# Altium PCB LowerMachine_test_v3.0.PcbDoc
Units mil, origin at the board's own origin, x right, y up, seen from the top; angles counter-clockwise.
Board outline 1968.5 x 1968.5 mil, 2 copper layers (Top Layer, Bottom Layer); 43 components, 58 nets, 180 pads, 51 vias.
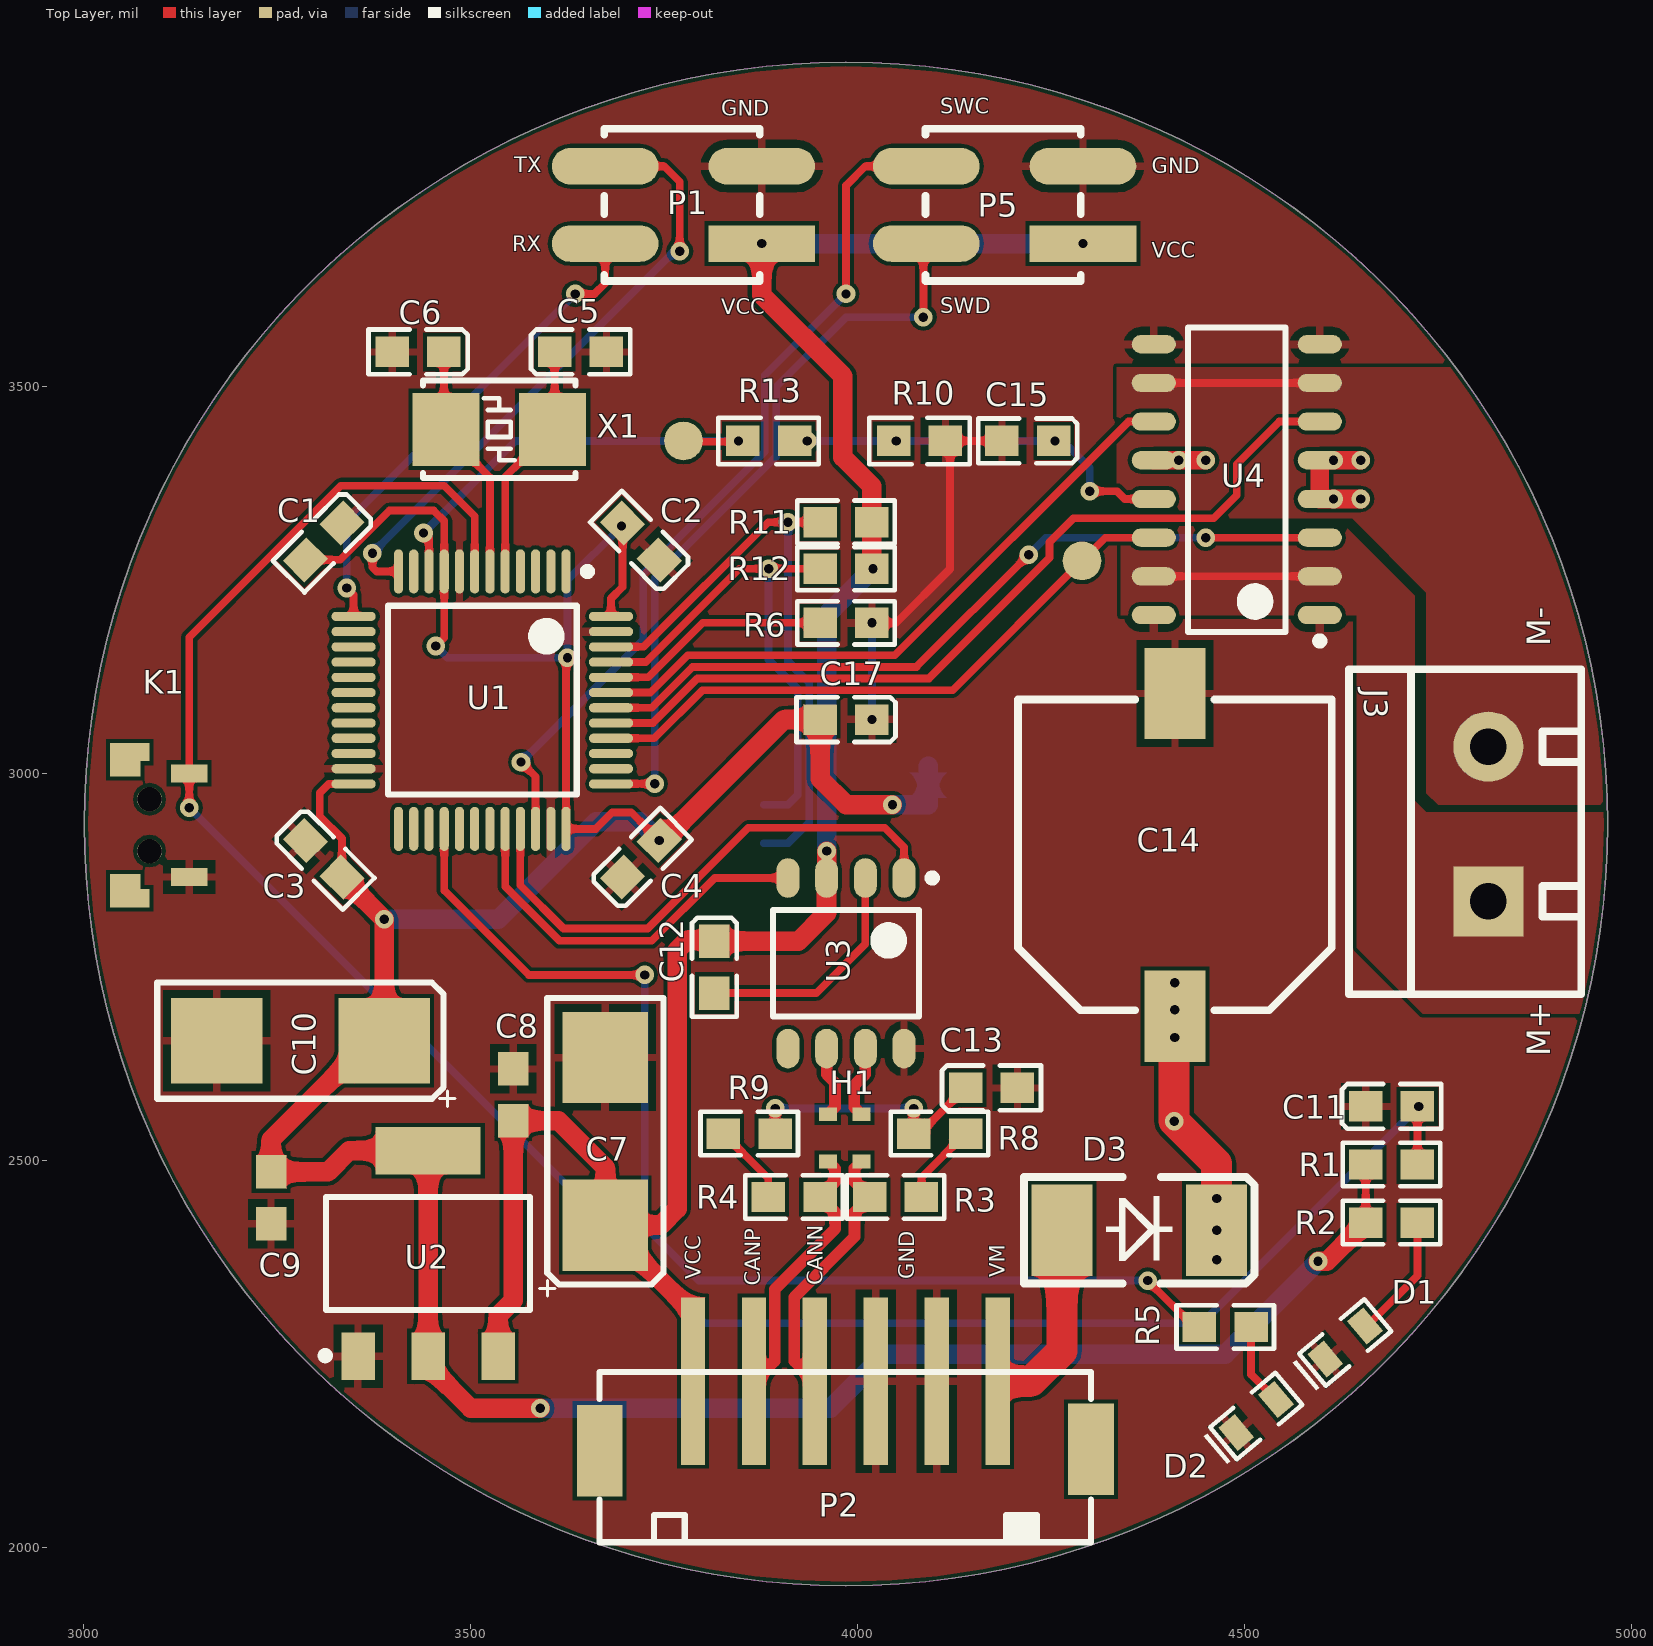
[diagram p0: Top Layer view]
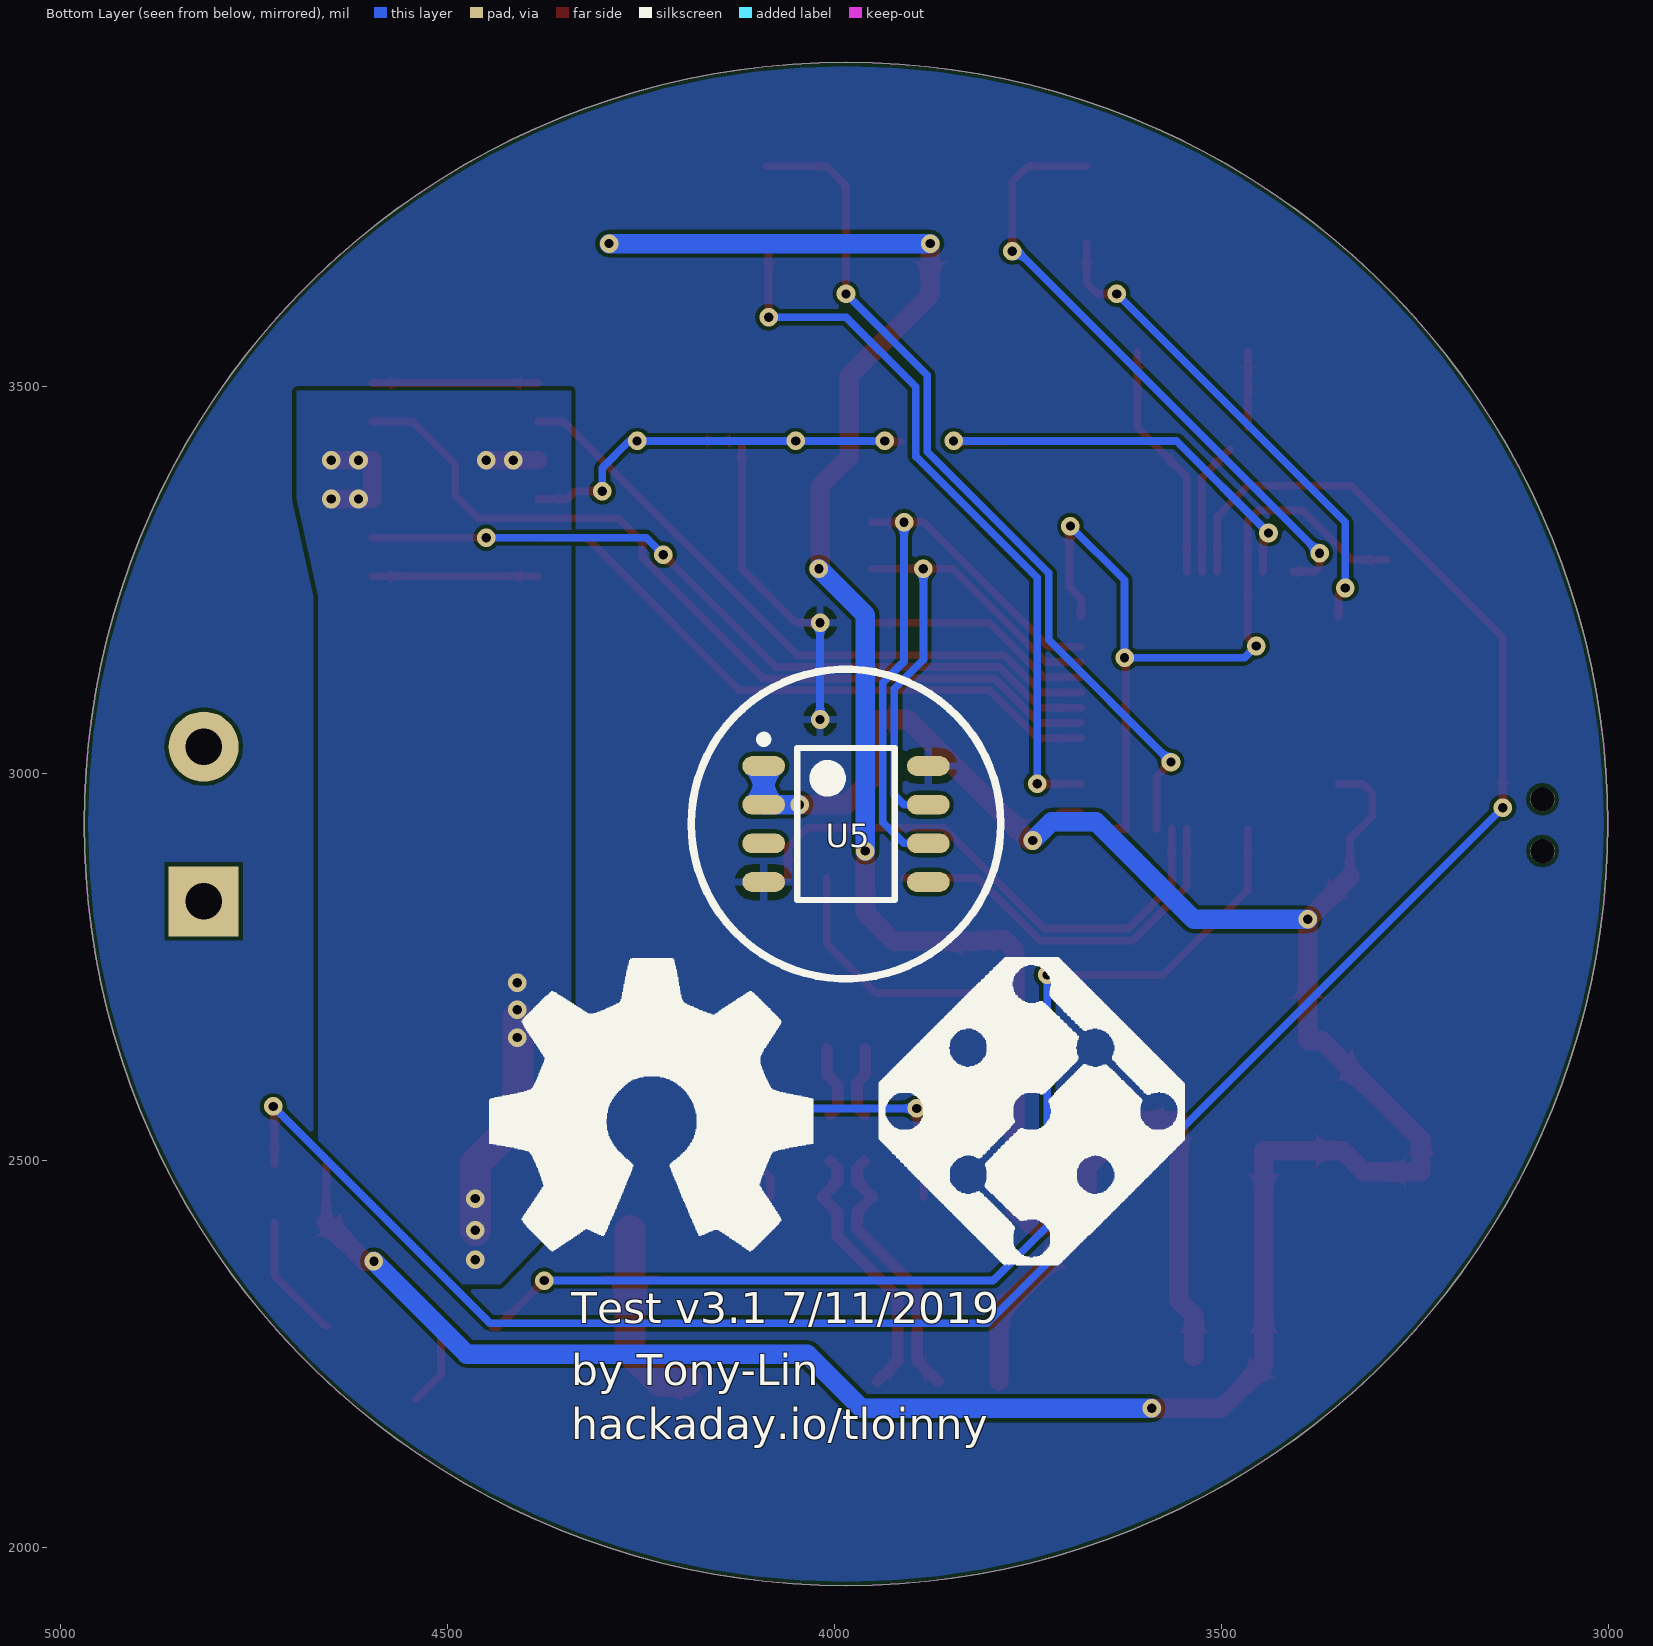
[diagram p1: Bottom Layer view, seen from below]

## Layer stack, top to bottom
Top Solder: solder mask 0.4, Solder Resist, Dk 3.5
Top Layer: signal copper 1.4
Dielectric 1: dielectric 12.6, FR-4, Dk 4.8
Bottom Layer: signal copper 1.4
Bottom Solder: solder mask 0.4, Solder Resist, Dk 3.5

## Board outline
3000.75,2935 ccw(c3985,2935) 3985,1950.75 ccw(c3985,2935) 4969.25,2935 ccw(c3985,2935) 3985,3919.25 ccw(c3985,2935)

## Design rules (kind name [scope] priority, off if disabled: settings)
Clearance [All] p1: gap=5
DiffPairsRouting [All] p1: maxlimit=10 minlimit=10 mostfreqgap=10 toplayer_minwidth=15 toplayer_maxwidth=15 toplayer_prefwidth=15 bottomlayer_minwidth=15 bottomlayer_maxwidth=15 bottomlayer_prefwidth=15 maxuncoupledlength=500
PolygonConnect PolygonConnect_3 [InNet('24V')] p1: connectstyle=Direct reliefconductorwidth=10 reliefentries=4 polygonreliefangle="90 Angle" airgapwidth=10
PolygonConnect PolygonConnect_2 [InNet('GND')] p2: connectstyle=Relief reliefconductorwidth=10 reliefentries=4 polygonreliefangle="90 Angle" airgapwidth=10
PolygonConnect PolygonConnect_1 [InNet('M+')] p3: connectstyle=Direct reliefconductorwidth=10 reliefentries=4 polygonreliefangle="90 Angle" airgapwidth=10
PolygonConnect [InNet('M-')] p4: connectstyle=Direct reliefconductorwidth=10 reliefentries=4 polygonreliefangle="90 Angle" airgapwidth=10
RoutingVias [All] p1: holewidth=28 width=50 viastyle="Through Hole" minholewidth=28 minwidth=50 maxholewidth=28 maxwidth=50
SolderMaskExpansion [All] p1: expansion=4
Width [All] p1: maxlimit=40 minlimit=6 preferedwidth=10
29 further rules are at their usual default settings.

## Classes and differential pairs
differential pair CAN: +CAN_P -CAN_N
differential pair IN: +IN_P -IN_N

## Components (designator, comment, footprint, x,y, rotation, side; value= is the part's Value field where it differs from the comment)
C1 "104" Cap-0603 3310,3300 r225 top
C2 "104" Cap-0603 3720,3300 r135 top
C3 "104" Cap-0603 3310,2890 r315 top
C4 "104" Cap-0603 3720,2890 r45 top
C5 "22pf" Cap-0603 3642,3545 r0 top
C6 "22pf" Cap-0603 3432,3545 r180 top
C7 "100uf" tan_cap_C 3674,2525 r90 top
C8 "104" Cap-0603-M 3555,2585 r270 top
C9 "104" Cap-0603-M 3242,2452 r90 top
C10 "100uf" tan_cap_C 3280,2655 r180 top
C11 "105" Cap-0603 4690,2570 r0 top
C12 "104" Cap-0603 3815,2750 r270 top
C13 "100nf" Cap-0603 4173,2594 r0 top
C14 "35v 470uf" CAPE_G_10X10.3X10.2 4410,2895 r270 top
C15 "10nf" Cap-0603 4220,3430 r180 top
C17 "100nf" Cap-0603 3985,3070 r180 top
D1 "LED_SMD_BLUE" LED_0603_B 4630,2265 r40 top
D2 "LED_SMD_WHITE" LED_0603_W 4515,2170 r40 top
D3 "1N5824" DO-214AC/SMA 4269,2410 r0 top
H1 "共模扼流圈" 共模扼流圈 4005,2560 r270 top
J3 "Motor interface" KF301-5.0-2P 4815,2835 r90 top
K1 "KEY" SW-SMD-2X4 3085,2900 r90 top
P1 "Header_2X2" Header_SMD_2.54X2 3775,3735 r90 top
P2 "PH2.0-6P" PH2.0S-6P 4181,2215 r180 top
P5 "Header_2X2" Header_SMD_2.54X2 4190,3735 r90 top
R1 "10K" Res-0603 4690,2495 r0 top
R2 "470R" Res-0603 4690,2420 r0 top
R3 "60R" Res-0603 4049,2453 r0 top
R4 "60R" Res-0603 3918,2453 r0 top
R5 "470" Res-0603 4475,2285 r0 top
R6 "10K" Res-0603 3985,3195 r180 top
R8 "0R" Res-0603 4106,2535 r180 top
R9 "0R" Res-0603 3860,2535 r180 top
R10 "1K" Res-0603 4080,3430 r180 top
R11 "4.7K" Res-0603 3985,3325 r180 top
R12 "4.7K" Res-0603 3985,3265 r180 top
R13 "10K" Res-0603 3885,3430 r0 top
U1 "stm32f103c8t6" stm32f103c8t6 3515,3095 r270 top
U2 "AMS1117" AMS1117 3445,2380 r0 top
U3 "tja1050" tja1050 3985,2755 r270 top
U4 "VNH7100" VNH7100 4490,3380 r180 top
U5 "AS5600" AS5600 3985,2935 r180 bottom
X1 "XTAL-2P" "OSC 5032-2P" 3537,3445 r0 top

## Footprints (in the part's own frame and the unit in brackets; to place one, negate y for a bottom-side part, rotate by r counter-clockwise, add the part's x,y. Pads: shape width x height; smd on the part's side, far side on the other; paste and mask are expansions set on the pad)
AMS1117 [mm]
  rect 1.1x1.55 smd: 1(-2.3,-3.375) 2(0,-3.375) 3(2.3,-3.375)
  rect 3.45x1.55 smd: 4(0,3.375)
  silkscreen extent -3.5,-3.48 3.35,1.85, body extent -3.25,-3.48 3.25,3.48, height 1.7
AS5600 [mm] "SOIC, 8-Leads, Body 4.90x3.90mm, Pitch 1.27mm, Thermal Pad 0.00x0.00mm, IPC Medium Density"
  oval 1.4x0.65 smd: 1(-2.7,1.905) 2(-2.7,0.635) 3(-2.7,-0.635) 4(-2.7,-1.905) 5(2.7,-1.905) 6(2.7,-0.635) 7(2.7,0.635) 8(2.7,1.905)
  silkscreen extent -2.83,-2.5 1.6,2.9, body extent -2,-2.5 2,2.5, height 1.75
Cap-0603 [mm]
  rect 1.1x1 smd: 1(-0.85,0) 2(0.85,0)
  silkscreen extent -1.63,-0.74 1.63,0.74, body extent -0.8,-0.4 0.8,0.4, height 0.6
Cap-0603-M [mm]
  rect 1.1x1 smd: 1(-0.85,0) 2(0.85,0)
  body extent -0.8,-0.4 0.8,0.4, height 0.6
CAPE_G_10X10.3X10.2 [mm]
  rect 3x2 smd: 1(5.3,0) 2(-5.3,0)
  silkscreen extent -5.1,-5.15 5.1,5.15, body extent -5.8,-5.15 5.8,5.15, height 10.2
DO-214AC/SMA [mm] "塑封二极管"
  rect 2x3 smd: A(-0.127,0) K(4.953,0)
  silkscreen extent -1.37,-1.75 6.2,1.75, body extent 0.11,-1.35 4.71,1.35, height 2.4
Header_SMD_2.54X2 [mm]
  rect 1.2x3.5 smd: 1(-1.27,-2.57)
  oval 1.2x3.5 smd: 2(1.27,-2.57) 3(1.27,2.57) 4(-1.27,2.57)
  silkscreen extent -2.5,-2.5 2.5,2.6, body extent -2.58,-3.75 2.5,3.75, height 9.7
KF301-5.0-2P [mm] "可拼接端子/6A"
  rect 2.3x2.3 hole 1.2: 1(0,0)
  round 2.3 hole 1.2: 2(5.08,0)
  silkscreen extent -3.05,-3.05 7.62,4.57, body extent -3,-3.09 7.5,4.51, height 10.05
LED_0603_B [mm]
  rect 0.7x1 smd: 1(-0.85,0) 2(0.85,0)
  silkscreen extent -1.75,-0.69 1.4,0.69, body extent -0.8,-0.42 0.8,0.38, height 0.61
LED_0603_W [mm]
  rect 0.7x1 smd: 1(-0.85,0) 2(0.85,0)
  silkscreen extent -1.75,-0.69 1.4,0.69, body extent -0.8,-0.42 0.8,0.38, height 0.61
"OSC 5032-2P" [mm]
  rect 2.2x2.4 smd: 1(-1.75,0) 2(1.75,0)
  silkscreen extent -2.5,-1.6 2.5,1.6, body extent -2.5,-1.52 2.5,1.68, height 0.86
PH2.0S-6P [mm]
  rect 1.5x3 smd: 0(-3.064,2.238) 0(13.064,2.286)
  rect 0.8x5.5 smd: 1(0,0) 2(2,0) 3(4,0) 4(6,0) 5(8,0) 6(10,0)
  silkscreen extent -3.06,-0.3 13.06,5.29, body extent -3,-2.5 13,5.3, height 6.15
Res-0603 [mm]
  rect 1.1x1 smd: 1(-0.85,0) 2(0.85,0)
  silkscreen extent -1.6,-0.71 1.6,0.71, body extent -0.8,-0.4 0.8,0.4, height 0.38
stm32f103c8t6 [mm] "QFP, 100-Leads, Body 14.00x20.00mm, Pitch 0.65mm, IPC Medium Density"
  oval 1.45x0.3 smd: 1(-4.225,2.75) 2(-4.225,2.25) 3(-4.225,1.75) 4(-4.225,1.25) 5(-4.225,0.75) 6(-4.225,0.25) 7(-4.225,-0.25) 8(-4.225,-0.75) 9(-4.225,-1.25) 10(-4.225,-1.75) 11(-4.225,-2.25) 12(-4.225,-2.75) 25(4.225,-2.75) 26(4.225,-2.25) 27(4.225,-1.75) 28(4.225,-1.25) 29(4.225,-0.75) 30(4.225,-0.25) 31(4.225,0.25) 32(4.225,0.75) 33(4.225,1.25) 34(4.225,1.75) 35(4.225,2.25) 36(4.225,2.75)
  oval 0.3x1.45 smd: 13(-2.75,-4.225) 14(-2.25,-4.225) 15(-1.75,-4.225) 16(-1.25,-4.225) 17(-0.75,-4.225) 18(-0.25,-4.225) 19(0.25,-4.225) 20(0.75,-4.225) 21(1.25,-4.225) 22(1.75,-4.225) 23(2.25,-4.225) 24(2.75,-4.225) 37(2.75,4.225) 38(2.25,4.225) 39(1.75,4.225) 40(1.25,4.225) 41(0.75,4.225) 42(0.25,4.225) 43(-0.25,4.225) 44(-0.75,4.225) 45(-1.25,4.225) 46(-1.75,4.225) 47(-2.25,4.225) 48(-2.75,4.225)
  silkscreen extent -4.35,-3.1 3.1,3.58, body extent -3.5,-3.5 3.5,3.5, height 1.6
SW-SMD-2X4 [mm]
  rect 0.6x1.3 smd: 0(-1.55,0.65) 0(3.25,0.65)
  rect 0.6x1 smd: 0(-1.05,0.8) 0(2.75,0.8)
  round 0.8 hole 0.8: 0(0,0) 0(1.7,0)
  rect 0.6x1.2 smd: 1(-0.85,-1.3) 3(2.55,-1.3)
  body extent -2.97,-1.8 4.83,1.8, height 3.5
tan_cap_C [mm]
  rect 3x2.8 smd: 1(-2.75,0) 2(2.75,0)
  silkscreen extent -5.08,-1.91 4.7,2.16, body extent -3.15,-1.6 3.15,1.6, height 2.5
tja1050 [mm] "SOP, 8-Leads, Body 4.90x3.90mm, Pitch 1.27mm, IPC Medium Density"
  oval 1.3x0.75 smd: 1(-2.8,1.905) 2(-2.8,0.635) 3(-2.8,-0.635) 4(-2.8,-1.905) 5(2.8,-1.905) 6(2.8,-0.635) 7(2.8,0.635) 8(2.8,1.905)
  silkscreen extent -2.92,-2.4 1.75,2.96, body extent -1.9,-2.4 1.9,2.4, height 1.75
VNH7100 [mm] "SOIC, 16-Leads, Body 9.90x3.90mm, Pitch 1.27mm, IPC Medium Density"
  oval 1.45x0.6 smd: 1(-2.725,4.445) 2(-2.725,3.175) 3(-2.725,1.905) 4(-2.725,0.635) 5(-2.725,-0.635) 6(-2.725,-1.905) 7(-2.725,-3.175) 8(-2.725,-4.445) 9(2.725,-4.445) 10(2.725,-3.175) 11(2.725,-1.905) 12(2.725,-0.635) 13(2.725,0.635) 14(2.725,1.905) 15(2.725,3.175) 16(2.725,4.445)
  silkscreen extent -2.85,-5 1.6,5.42, body extent -2,-5 2,5, height 1.75
共模扼流圈 [mm]
  rect 0.45x0.6 smd: 1(0,0) 2(0,-1.1) 3(1.55,-1.1) 4(1.55,0)

## Part data
C1 C2 C3 C4 C5 C6 C8 C9 C11 C12 C13: library part CAP
C7 C10: library part tan_cap
C14: library part CAPE-SMD, "贴片电解电容"
C15 C17: library part CAP, "贴片陶瓷电容"
D1 D2: "发光二极管"
D3: library part DIODE, "普通二极管"
J3: library part KF301-2P
R1 R2 R3 R4 R5 R6 R8 R9 R10 R11 R12 R13: library part RES, "贴片电阻"
X1: "2脚无源脚晶振"

## Free pads (board coordinates)
  round 50 smd: 1(4290,3275) 2(3775,3430)

## Via types
v1: diameter 24, hole 12, Top Layer to Bottom Layer, 51 vias

## Nets (pads, with @x,y where several pads share a name; then routed paths per layer and width w, separated by ;. In a path a pad name is that pad's centre, name@x,y a point inside that pad or via, vN(x,y) a via of type N, cw(c..) or ccw(c..) an arc to the next point about the centre after c; other vN are vias at no path point)
3.3V: C1.2 C2.2 C3.2 C4.2 C9.2 C10.1 C17.2 R1.1 R2.1 U1.9 U1.24 U1.36 U1.48 U2.2 U2.4 U5.1 U5.2 | length 4760.9
  Top Layer w10: C1.2 3331.34,3276.34 3395,3340 3452.37,3340 3465.79,3326.59 U1.9 3465.79,3175.79 v1(3455,3165) ; C3.2 3333.66,2916.34 3305,2945 3305,2975 3316.73,2986.73 U1.24 ; v1(3625,3150) 3623.27,3148.27 U1.36 3661.66,2928.66 3683,2950 3707.33,2950 v1(3743.66,2913.66) ; U1.48 3681.34,3226.34 3696.34,3241.34 C2.2 ; R2.1 R1.1
  Top Layer w25: C3.2 v1(3388.27,2811.73) C10.1 3370,2655 3242,2527 C9.2 3315.46,2485.46 3342.87,2512.87 U2.4 U2.2 3445,2235 3500,2180 v1(3590,2180) ; v1(3743.66,2913.66) 3748.66,2913.66 3905,3070 C17.2 3951.54,2993.46 3985,2960 v1(4045,2960) ; v1(4595,2370) 4606.54,2370 R2.1
  Bottom Layer w10: v1(3455,3165) 3470,3150 v1(3625,3150) 3625,3250 v1(3695,3320)
  Bottom Layer w25: v1(3388.27,2811.73) 3535.73,2811.73 3662,2938 3719.33,2938 v1(3743.66,2913.66) ; v1(3590,2180) 3965,2180 4035,2250 4475,2250 v1(4595,2370) ; v1(4045,2960) U5.2 U5.1
24V: C14.1 D3.K U4.4 U4.5 U4.12 | length 520.8
  Top Layer w24: U4.12 v1(4450,3405) ; v1(4650,3355) U4.4 U4.5 v1(4650,3405)
  Top Layer w40: C14.1@4409,2685.34 4409,2592.34 v1(4409,2551) 4464,2496 v1(4464,2410)
  other v1: 4464,2372 4464,2451 4410,2659 4410,2695 4410,2730 4615,3355 4415,3405 4615,3405
ADC: pad.2 R13.1 U1.10 | length 585.4
  Top Layer w10: v1(3439,3311) 3446.1,3303.9 U1.10 ; pad.2 3776,3429 R13.1@3846.54,3429 ; v1(3846,3430) R13.1@3850.54,3430
  Bottom Layer w10: v1(3439,3311) 3558,3430 3775,3430 v1(3846,3430)
BOOT0: R6.2 U1.44 | length 299.4
  Top Layer w10: U1.44 3729.27,3124.53 3799.75,3195 R6.2
BOOT1: U1.20
CAN_N: H1.4 P2.4 R3.1 | length 347.7
  Top Layer w15: P2.4 3937.28,2222.5 3936.5,2222.5 3918,2241 3918,2323.64 3996,2401.64 3996,2433.46 R3.1 3996,2472.54 3996,2489.98 H1.4
CAN_P: H1.3 P2.5 R4.2 | length 348.1
  Top Layer w15: P2.5 3873.54,2222.5 3874.5,2222.5 3893,2241 3893,2334 3971,2412 3971,2433.46 R4.2 3971,2472.54 3971,2489.67 H1.3
CAN_RX: U1.32 U3.4 | length 502.6
  Top Layer w10: U1.32 3544.53,2854.26 3614.79,2784 3734,2784 3815.24,2865.24 U3.4
CAN_TX: U1.33 U3.1 | length 695.7
  Top Layer w10: U1.33 3564.21,2855.79 3620,2800 3728.79,2800 3858.79,2930 4035,2930 4060,2905 U3.1
GND: C1.1 C2.1 C3.1 C4.1 C5.2 C6.2 C7.2 C8.1 C9.1 C10.2 C11.1 C13.2 C14.2 C15.2 C17.1 D1.1 D2.1 K1.1 P1.2 P2.2 P2.3 P5.2 R6.1 R10.1 U1.8 U1.23 U1.35 U1.47 U2.1 U3.8 U4.1 U4.8 U4.9 U4.16 U5.4 U5.8 | length 492.4
  Top Layer w10: v1(4018.46,3195) 4050,3195 4119.46,3264.46 R10.1@4119.46,3429 ; R10.1 C15.2
  Bottom Layer w10: v1(4018.46,3070) v1(4018.46,3195)
IN_N: H1.1 U3.7 | length 94.4
  Top Layer w15: H1.1 3995.85,2569.15 3995.85,2597.52 4010,2611.67 U3.7
IN_P: H1.2 U3.6 | length 93
  Top Layer w15: U3.6 3960,2611.67 3970.85,2600.83 3970.85,2569.15 H1.2
JTCK: P5.4 U1.37 | length 958.7
  Top Layer w10: U1.37 3681.61,2987 v1(3738,2987) ; v1(4085,3590) 4085,3681.18 P5.4
  Bottom Layer w10: v1(3738,2987) 3738,3253 3895,3410 3895,3500 3985,3590 v1(4085,3590)
JTMS: P5.3 U1.34 | length 1127.3
  Top Layer w10: v1(3565,3015) 3583.9,2996.1 U1.34 ; v1(3985,3620) 3985,3760 4010,3785 P5.3
  Bottom Layer w10: v1(3565,3015) 3723,3173 3723,3259.21 3880,3416.21 3880,3515 v1(3985,3620)
M+: J3.1 U4.2 U4.15 | length 214.6
  Top Layer w10: U4.15 U4.2
M-: J3.2 U4.7 U4.10 | length 214.6
  Top Layer w10: U4.10 U4.7
NetC12_2: C12.2 U3.2 | length 306.5
  Top Layer w10: C12.2 3946.54,2716.54 4010,2780 U3.2
NetC13_1: C13.1 R8.2 R9.1 | length 335.3
  Top Layer w10: R9.1 v1(3893.46,2567.46) ; R8.2@4072.46,2535.07 v1(4072.46,2567.46) ; R8.2 4080.54,2535 C13.1
  Bottom Layer w10: v1(3893.46,2567.46) v1(4072.46,2567.46)
NetC15_1: C15.1 R10.2 R13.2 U4.13 | length 516.9
  Top Layer w10: R13.2@3913.46,3429 R13.2@3934,3429 ; v1(4300,3365) 4335.2,3365 4345.2,3355 U4.13
  Bottom Layer w10: v1(3935,3430) v1(4050,3430) 4265,3430 4300,3395 v1(4300,3365)
  other v1: 4255,3430
NetD1_2: D1.2 R2.2 | length 163.3
  Top Layer w10: D1.2 4658.52,2286.52 4723.46,2351.46 R2.2
NetD2_2: D2.2 R5.2 | length 106.8
  Top Layer w10: R5.2 4508.46,2223.69 D2.2
NetD3_A: D3.A P2.1 | length 246.2
  Top Layer w40: P2.1@4190,2215 4225,2215 4264,2254 D3.A
NetR3_2: R3.2 R8.1 | length 105.6
  Top Layer w10: R3.2 4082.46,2478 R8.1
NetR4_1: R4.1 R9.2 | length 106
  Top Layer w10: R9.2 3884.54,2477 R4.1
NRST: C11.2 K1.3 R1.2 U1.7 | length 2820.4
  Top Layer w10: v1(3136.18,2956.18) K1.3 3136.18,3176.18 3332,3372 3465.63,3372 3505.16,3332.47 U1.7 ; R1.2 C11.2
  Bottom Layer w10: v1(3136.18,2956.18) 3802.36,2290 4445,2290 v1(4725,2570) v1@4720,2565
OSC8M_IN: C5.1 U1.5 X1.2 | length 303.8
  Top Layer w10: U1.5 3544.53,3383.63 X1.2@3604,3443.1 ; X1.2@3608.54,3447.64 C5.1
OSC8M_OUT: C6.1 U1.6 X1.1 | length 270.6
  Top Layer w10: X1.1@3465.46,3447.64 C6.1 ; X1.1@3488.46,3419.54 3524.84,3383.16 U1.6
OSC32_IN: U1.3
OSC32_OUT: U1.4
PA1: U1.11
PA2: P1.3 U1.12 | length 807.1
  Top Layer w10: v1(3373,3285) 3373,3267 3378.66,3261.34 U1.12 ; P1.3 3750,3785 3770,3765 v1(3770,3675)
  Bottom Layer w10: v1(3373,3285) 3763,3675 v1(3770,3675)
PA3: P1.4 U1.13 | length 638.2
  Top Layer w10: v1(3340,3240) 3348.66,3231.34 U1.13 ; v1(3635,3620) 3660,3620 3673.82,3633.82 P1.4
  Bottom Layer w10: v1(3340,3240) 3340,3325 v1(3635,3620)
PA4: U1.14
PA5: U1.15
PA6: U1.16
PA7: U1.17
PA8: U1.29
PA9: U1.30
PA10: U1.31
PA15: U1.38
PB0: U1.18
PB1: U1.19
PB3: U1.39
PB4: pad.1 U1.40 U4.14 | length 808.7
  Top Layer w10: U1.40 3737.29,3045.79 3799.5,3108 4123,3108 pad.1 4320,3305 U4.14
PB5: U1.41 U4.6 | length 1112.5
  Top Layer w10: U1.41 3735.47,3065.47 3793,3123 4092.11,3123 4248,3278.89 4248,3299 4279,3330 4460,3330 4490,3360 4490,3400 4545,3455 U4.6
PB6: U1.42 U4.3 | length 1007
  Top Layer w10: U1.42 3733.94,3085.16 3786.79,3138 4076,3138 v1(4221,3283) ; v1(4450,3305) U4.3
  Bottom Layer w10: v1(4221,3283) 4243,3305 v1(4450,3305)
PB7: U1.43 U4.11 | length 846.4
  Top Layer w10: U1.43 3732.22,3104.84 3780.37,3153 4048,3153 4350,3455 U4.11
PB8: R12.2 U1.45 U5.7 | length 677.2
  Top Layer w10: U1.45 3726.33,3144.21 3847.12,3265 v1(3885,3265) R12.2
  Bottom Layer w10: U5.7 3910,2960 3922.5,2972.5 3922.5,3109.87 3885,3147.37 v1(3885,3265)
PB9: R11.2 U1.46 U5.6 | length 806
  Top Layer w10: U1.46 3723.39,3163.9 3884.49,3325 v1(3910,3325) R11.2
  Bottom Layer w10: U5.6 3910,2910 3937.5,2937.5 3937.5,3117.5 3910,3145 v1(3910,3325)
PB10: U1.21
PB11: U1.22
PB12: U1.25
PB13: U1.26
PB14: U1.27
PB15: R5.1 U1.28 | length 1479.3
  Top Layer w10: U1.28 3465.79,2849.21 3575,2740 v1(3725,2740) ; v1(4375,2345) 4435,2285 R5.1
  Bottom Layer w10: v1(3725,2740) 3725,2415 3795,2345 v1(4375,2345)
PC13: U1.2
VBAT: U1.1
VCC: C7.1 C8.2 C12.1 P1.1 P2.6 P5.1 R11.1 R12.1 U2.3 U3.3 | length 2793.2
  Top Layer w25: U2.3 3535.55,2300 3555,2319.45 C8.2 3613.46,2551.54 3674,2491 C7.1 ; P2.6 3787.3,2303.43 C7.1 ; v1(3876.18,3685) 3876.18,3618.59 3981,3513.77 3981,3409 4018.46,3371.54 R11.1 R12.1 ; v1(3960,2900) U3.3 3960,2820 3923.5,2783.5 C12.1 C12.1 3813.46,2785 3780,2785 3767,2772 3767,2438 3745.73,2416.73 C7.1
  Bottom Layer w25: v1(3876.18,3685) v1(4291.18,3685) ; v1(3960,2900) 3960,3205 v1(4020,3265)
pads on no net: K1.0 P2.0 U3.5 U5.3 U5.5

## Polygon pours and split planes (outlines as drawn)
24V on Bottom Layer "Top Layer-No Net" (solid, remove dead copper, pour order 16): 4695,3495 4695,3355 4675,3265 4667.12,3229.53 4667.12,2340 4431.61,2340 4340,2435 4340,2470 4340,3495
GND on Bottom Layer "Top Layer-No Net" (solid, remove dead copper, pour order 24): 2916,3946 2916,1768 2814,1666 2956,1808 5468,1808 5468,3536 4923,4081
M- on Top Layer "Top Layer-No Net" (solid, remove dead copper, pour order 18): 4335,3525 4335,3340 4345,3330 4639.12,3330 4735,3234.12 4735,2975 4750,2960 4990,2960 4990,3510 4975,3525
M+ on Top Layer "Top Layer-No Net" (solid, remove dead copper, pour order 20): 4340,3320 4340,3205 4645,3205 4645,2775 4730,2690 5085,2690 5085,2935 5080,2940 5070,2950 4740,2950 4735,2950 4720,2965 4720,3230 4630,3320
GND on Top Layer "Top Layer-No Net" (solid, remove dead copper, pour order 30): 2795,4153 2795,2080 2993,1882 3041,1930 5519,1930 5519,3818 5253,4084

## Keep-outs
Keep-Out Layer:
  circle w0.5: c3985,2935 r984.25

## Silkscreen, mask and mechanical layers (free items; w line width, h text height)
Top Overlay:
  lines w5: 3392.95,3217.05 3392.95,3217.05 ; 3637.05,2972.95 3637.05,2972.95
  text "SWC" at 4107,3853 h20
  text "GND" at 3824,3850 h20
  text "TX" at 3556,3777 h20
  text "GND" at 4380,3776 h20
  text "RX" at 3554,3675 h20
  text "VCC" at 4380,3667 h20
  text "SWD" at 4107,3595 h20
  text "VCC" at 3824,3594 h20
  text "M-" at 4895,3165 h30 r90
  text "M+" at 4895,2635 h30 r90
  text "VM" at 4190,2349 h20 r90
  text "VCC" at 3797,2347 h20 r90
  text "GND" at 4073,2347 h20 r90
  text "CANN" at 3955,2339 h20 r90
  text "CANP" at 3874,2338 h20 r90
Bottom Overlay:
  drawing of 1719 lines, arcs and shapes, not listed
  text "Test v3.1 7/11/2019" at 4340,2290 h40
  text "by Tony-Lin" at 4340,2210 h40
  text "hackaday.io/tloinny" at 4340,2140 h40